# Altium PCB Module Board.PcbDoc (part 3 of 6)
Units mm, origin at the board's own origin, x right, y up, seen from the top; angles counter-clockwise.
Board outline 300 x 80 mm, 4 copper layers (Top Layer, GND1-Layer, GND2-Layer, Bottom Layer), stack 1.586 mm thick; 425 components, 248 nets, 1063 pads, 936 vias.
Unrouted connection lines stored in the file: 3.
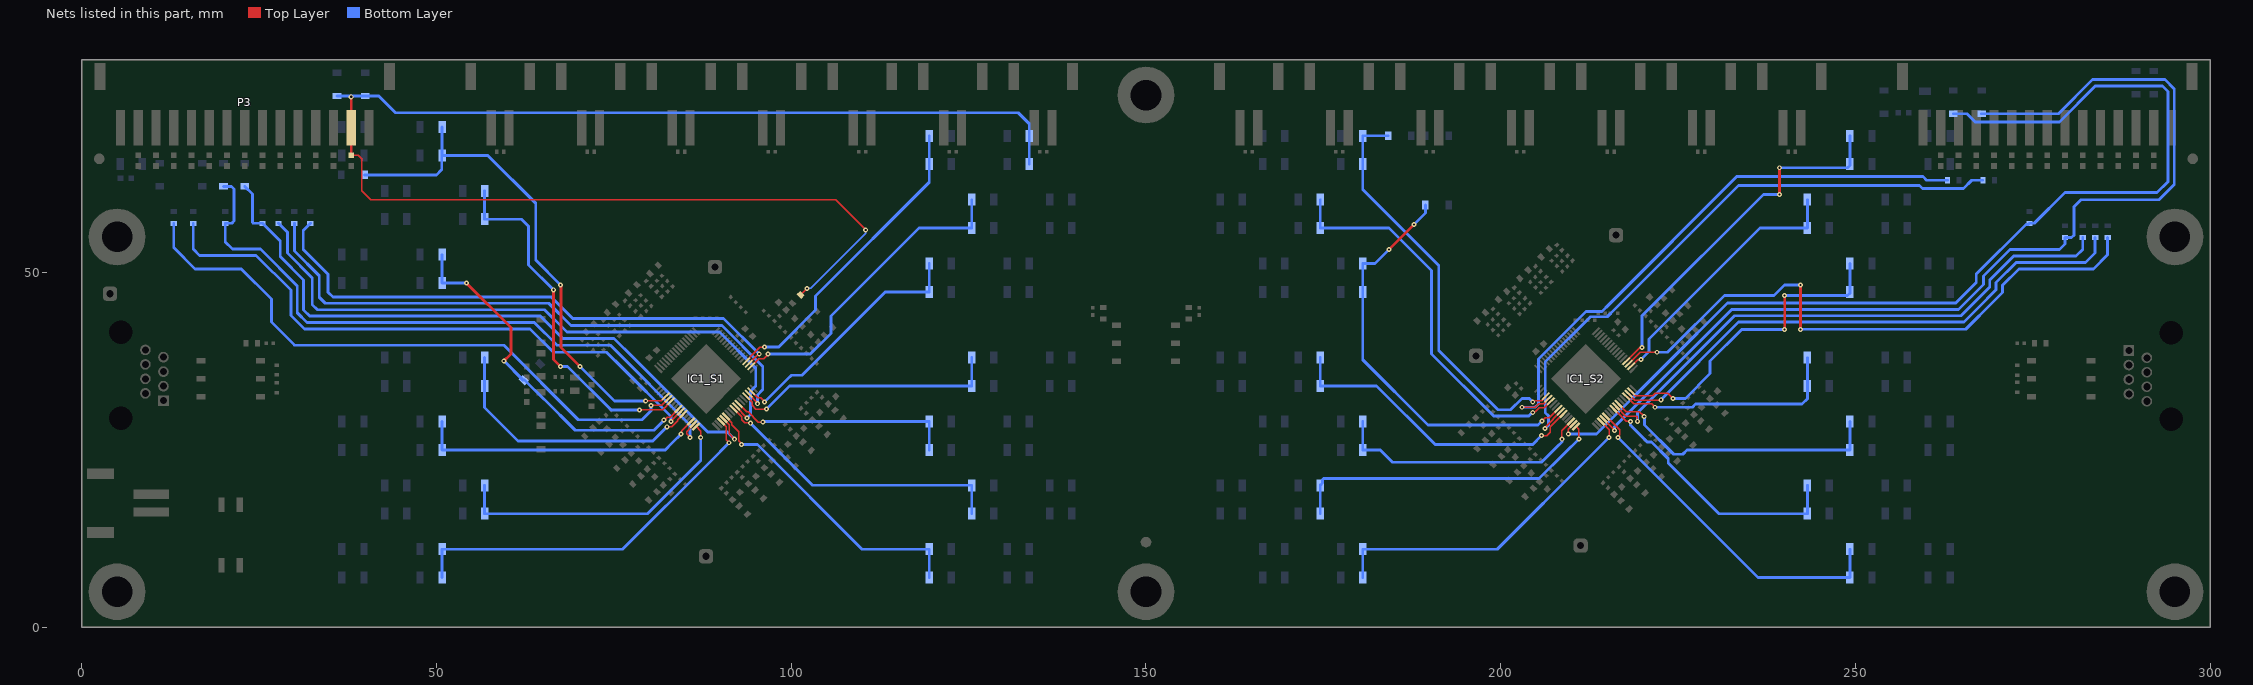
[diagram p5: the nets of this part, all layers, seen from the top]

## Components (designator, comment, footprint, x,y, rotation, side; value= is the part's Value field where it differs from the comment) (continued)
R40_S2 "RES 0603 2R 1%" RES_SM0603_YAGEORC_N 283.75,55.75 r90 bottom value=2R (schematic designator R40)
R41_S1 "RES 0603 3kR 1%" RES_SM0603_YAGEORC_N 106.75,30 r315 top value=3kR (schematic designator R41)
R41_S2 "RES 0603 3kR 1%" RES_SM0603_YAGEORC_N 231,30.75 r315 top value=3kR (schematic designator R41)
R42_S1 "RES 0402 2kR 1%" FP0402 104,32.75 r315 top value=2kR (schematic designator R42)
R42_S2 "RES 0402 2kR 1%" FP0402 228.25,33.5 r315 top value=2kR (schematic designator R42)
R43_S1 "RES 0603 3kR 1%" RES_SM0603_YAGEORC_N 105.28,41.72 r45 top value=3kR (schematic designator R43)
R43_S2 "RES 0603 3kR 1%" RES_SM0603_YAGEORC_N 228,42.5 r45 top value=3kR (schematic designator R43)
R44_S1 "RES 0402 2kR 1%" FP0402 102.53,38.97 r45 top value=2kR (schematic designator R44)
R44_S2 "RES 0402 2kR 1%" FP0402 225.25,39.75 r45 top value=2kR (schematic designator R44)
R45_S1 "RES 0603 2R 1%" RES_SM0603_YAGEORC_N 32.25,57.75 r90 bottom value=2R (schematic designator R45)
R45_S2 "RES 0603 2R 1%" RES_SM0603_YAGEORC_N 285.5,55.75 r90 bottom value=2R (schematic designator R45)
R46_S1 "RES 0603 3kR 1%" RES_SM0603_YAGEORC_N 103.03,43.97 r45 top value=3kR (schematic designator R46)
R46_S2 "RES 0603 3kR 1%" RES_SM0603_YAGEORC_N 225.75,44.75 r45 top value=3kR (schematic designator R46)
R47_S1 "RES 0402 2kR 1%" FP0402 100.28,41.22 r45 top value=2kR (schematic designator R47)
R47_S2 "RES 0402 2kR 1%" FP0402 223,42 r45 top value=2kR (schematic designator R47)
R48_S1 "RES 0603 3kR 1%" RES_SM0603_YAGEORC_N 100.75,46.25 r45 top value=3kR (schematic designator R48)
R48_S2 "RES 0603 3kR 1%" RES_SM0603_YAGEORC_N 223.5,47 r45 top value=3kR (schematic designator R48)
R49_S1 "RES 0402 2kR 1%" FP0402 98,43.5 r45 top value=2kR (schematic designator R49)
R49_S2 "RES 0402 2kR 1%" FP0402 220.75,44.25 r45 top value=2kR (schematic designator R49)
R50_S1 "RES 1206 10R 1%" RES_SM1206_YAGEORC_N 7,65.25 r0 bottom value=10R (schematic designator R50)
R50_S2 "RES 1206 10R 1%" RES_SM1206_YAGEORC_N 259.75,74 r90 bottom value=10R (schematic designator R50)
R51 "RES 0402 120R 1%" FP0402 67.25,35.25 r0 top value=120R
R52 "RES 0402 120R 1%" FP0402 67.25,33.25 r0 top value=120R
R53 "RES 0603 150R 1%" RES_SM0603_YAGEORC_N 24,40 r180 top value=150R
R54 "RES 0603 150R 1%" RES_SM0603_YAGEORC_N 144,44.25 r90 top value=150R
R55 "RES 0603 150R 1%" RES_SM0603_YAGEORC_N 156,44.25 r270 top value=150R
R56 "RES 0603 150R 1%" RES_SM0603_YAGEORC_N 276,40 r0 top value=150R
R57_RB_C11 "RES 1206 20R 1%" RES_SM1206_YAGEORC_N 132,69.25 r180 bottom value=20R (schematic designator R57)
R57_RB_C12 "RES 1206 20R 1%" RES_SM1206_YAGEORC_N 261.75,69.25 r180 bottom value=20R (schematic designator R57)
R57_RB_C21 "RES 1206 20R 1%" RES_SM1206_YAGEORC_N 138,60.25 r180 bottom value=20R (schematic designator R57)
R57_RB_C22 "RES 1206 20R 1%" RES_SM1206_YAGEORC_N 255.75,60.25 r180 bottom value=20R (schematic designator R57)
R57_RB_C31 "RES 1206 20R 1%" RES_SM1206_YAGEORC_N 132,51.25 r180 bottom value=20R (schematic designator R57)
R57_RB_C32 "RES 1206 20R 1%" RES_SM1206_YAGEORC_N 261.75,47.25 r180 bottom value=20R (schematic designator R57)
R57_RB_C41 "RES 1206 20R 1%" RES_SM1206_YAGEORC_N 138,34 r180 bottom value=20R (schematic designator R57)
R57_RB_C42 "RES 1206 20R 1%" RES_SM1206_YAGEORC_N 255.75,38 r180 bottom value=20R (schematic designator R57)
R57_RB_C51 "RES 1206 20R 1%" RES_SM1206_YAGEORC_N 132,11 r180 bottom value=20R (schematic designator R57)
R57_RB_C52 "RES 1206 20R 1%" RES_SM1206_YAGEORC_N 261.75,7 r180 bottom value=20R (schematic designator R57)
R57_RB_C61 "RES 1206 20R 1%" RES_SM1206_YAGEORC_N 38.25,7 r0 bottom value=20R (schematic designator R57)
R57_RB_C62 "RES 1206 20R 1%" RES_SM1206_YAGEORC_N 168,11 r0 bottom value=20R (schematic designator R57)
R57_RB_C71 "RES 1206 20R 1%" RES_SM1206_YAGEORC_N 44.25,16 r0 bottom value=20R (schematic designator R57)
R57_RB_C72 "RES 1206 20R 1%" RES_SM1206_YAGEORC_N 162,20 r0 bottom value=20R (schematic designator R57)
R57_RB_C81 "RES 1206 20R 1%" RES_SM1206_YAGEORC_N 38.25,25 r0 bottom value=20R (schematic designator R57)
R57_RB_C82 "RES 1206 20R 1%" RES_SM1206_YAGEORC_N 168,29 r0 bottom value=20R (schematic designator R57)
R57_RB_C91 "RES 1206 20R 1%" RES_SM1206_YAGEORC_N 44.25,34 r0 bottom value=20R (schematic designator R57)
R57_RB_C92 "RES 1206 20R 1%" RES_SM1206_YAGEORC_N 162,38 r0 bottom value=20R (schematic designator R57)
R57_RB_C101 "RES 1206 20R 1%" RES_SM1206_YAGEORC_N 38.25,48.5 r0 bottom value=20R (schematic designator R57)
R57_RB_C102 "RES 1206 20R 1%" RES_SM1206_YAGEORC_N 168,51.25 r0 bottom value=20R (schematic designator R57)
R57_RB_C121 "RES 1206 20R 1%" RES_SM1206_YAGEORC_N 38.25,70.5 r0 bottom value=20R (schematic designator R57)
R57_RB_C122 "RES 1206 20R 1%" RES_SM1206_YAGEORC_N 168,69.25 r0 bottom value=20R (schematic designator R57)
R57_RB_C1111 "RES 1206 20R 1%" RES_SM1206_YAGEORC_N 44.25,61.5 r0 bottom value=20R (schematic designator R57)
R57_RB_C1112 "RES 1206 20R 1%" RES_SM1206_YAGEORC_N 162,56.25 r0 bottom value=20R (schematic designator R57)
R57_RB_NA11 "RES 1206 20R 1%" RES_SM1206_YAGEORC_N 132,29 r180 bottom value=20R (schematic designator R57)
R57_RB_NA12 "RES 1206 20R 1%" RES_SM1206_YAGEORC_N 261.75,29 r180 bottom value=20R (schematic designator R57)
R57_RB_NA21 "RES 1206 20R 1%" RES_SM1206_YAGEORC_N 138,16 r180 bottom value=20R (schematic designator R57)
R57_RB_NA22 "RES 1206 20R 1%" RES_SM1206_YAGEORC_N 255.75,16 r180 bottom value=20R (schematic designator R57)
R58_RB_C11 "RES 1206 20R 1%" RES_SM1206_YAGEORC_N 121,69.25 r180 bottom value=20R (schematic designator R58)
R58_RB_C12 "RES 1206 20R 1%" RES_SM1206_YAGEORC_N 250.75,69.25 r180 bottom value=20R (schematic designator R58)
R58_RB_C21 "RES 1206 20R 1%" RES_SM1206_YAGEORC_N 127,60.25 r180 bottom value=20R (schematic designator R58)
R58_RB_C22 "RES 1206 20R 1%" RES_SM1206_YAGEORC_N 244.75,60.25 r180 bottom value=20R (schematic designator R58)
R58_RB_C31 "RES 1206 20R 1%" RES_SM1206_YAGEORC_N 121,51.25 r180 bottom value=20R (schematic designator R58)
R58_RB_C32 "RES 1206 20R 1%" RES_SM1206_YAGEORC_N 250.75,47.25 r180 bottom value=20R (schematic designator R58)
R58_RB_C41 "RES 1206 20R 1%" RES_SM1206_YAGEORC_N 127,34 r180 bottom value=20R (schematic designator R58)
R58_RB_C42 "RES 1206 20R 1%" RES_SM1206_YAGEORC_N 244.75,38 r180 bottom value=20R (schematic designator R58)
R58_RB_C51 "RES 1206 20R 1%" RES_SM1206_YAGEORC_N 121,11 r180 bottom value=20R (schematic designator R58)
R58_RB_C52 "RES 1206 20R 1%" RES_SM1206_YAGEORC_N 250.75,7 r180 bottom value=20R (schematic designator R58)
R58_RB_C61 "RES 1206 20R 1%" RES_SM1206_YAGEORC_N 49.25,7 r0 bottom value=20R (schematic designator R58)
R58_RB_C62 "RES 1206 20R 1%" RES_SM1206_YAGEORC_N 179,11 r0 bottom value=20R (schematic designator R58)
R58_RB_C71 "RES 1206 20R 1%" RES_SM1206_YAGEORC_N 55.25,16 r0 bottom value=20R (schematic designator R58)
R58_RB_C72 "RES 1206 20R 1%" RES_SM1206_YAGEORC_N 173,20 r0 bottom value=20R (schematic designator R58)
R58_RB_C81 "RES 1206 20R 1%" RES_SM1206_YAGEORC_N 49.25,25 r0 bottom value=20R (schematic designator R58)
R58_RB_C82 "RES 1206 20R 1%" RES_SM1206_YAGEORC_N 179,29 r0 bottom value=20R (schematic designator R58)
R58_RB_C91 "RES 1206 20R 1%" RES_SM1206_YAGEORC_N 55.25,34 r0 bottom value=20R (schematic designator R58)
R58_RB_C92 "RES 1206 20R 1%" RES_SM1206_YAGEORC_N 173,38 r0 bottom value=20R (schematic designator R58)
R58_RB_C101 "RES 1206 20R 1%" RES_SM1206_YAGEORC_N 49.25,48.5 r0 bottom value=20R (schematic designator R58)
R58_RB_C102 "RES 1206 20R 1%" RES_SM1206_YAGEORC_N 179,51.25 r0 bottom value=20R (schematic designator R58)
R58_RB_C121 "RES 1206 20R 1%" RES_SM1206_YAGEORC_N 49.25,70.5 r0 bottom value=20R (schematic designator R58)
R58_RB_C122 "RES 1206 20R 1%" RES_SM1206_YAGEORC_N 179,69.25 r0 bottom value=20R (schematic designator R58)
R58_RB_C1111 "RES 1206 20R 1%" RES_SM1206_YAGEORC_N 55.25,61.5 r0 bottom value=20R (schematic designator R58)
R58_RB_C1112 "RES 1206 20R 1%" RES_SM1206_YAGEORC_N 173,56.25 r0 bottom value=20R (schematic designator R58)
R58_RB_NA11 "RES 1206 20R 1%" RES_SM1206_YAGEORC_N 121,29 r180 bottom value=20R (schematic designator R58)
R58_RB_NA12 "RES 1206 20R 1%" RES_SM1206_YAGEORC_N 250.75,29 r180 bottom value=20R (schematic designator R58)
R58_RB_NA21 "RES 1206 20R 1%" RES_SM1206_YAGEORC_N 127,16 r180 bottom value=20R (schematic designator R58)
R58_RB_NA22 "RES 1206 20R 1%" RES_SM1206_YAGEORC_N 244.75,16 r180 bottom value=20R (schematic designator R58)
R59_RB_C11 "RES 1206 20R 1%" RES_SM1206_YAGEORC_N 132,65.25 r180 bottom value=20R (schematic designator R59)
R59_RB_C12 "RES 1206 20R 1%" RES_SM1206_YAGEORC_N 261.75,65.25 r180 bottom value=20R (schematic designator R59)
R59_RB_C21 "RES 1206 20R 1%" RES_SM1206_YAGEORC_N 138,56.25 r180 bottom value=20R (schematic designator R59)
R59_RB_C22 "RES 1206 20R 1%" RES_SM1206_YAGEORC_N 255.75,56.25 r180 bottom value=20R (schematic designator R59)
R59_RB_C31 "RES 1206 20R 1%" RES_SM1206_YAGEORC_N 132,47.25 r180 bottom value=20R (schematic designator R59)
R59_RB_C32 "RES 1206 20R 1%" RES_SM1206_YAGEORC_N 261.75,51.25 r180 bottom value=20R (schematic designator R59)
R59_RB_C41 "RES 1206 20R 1%" RES_SM1206_YAGEORC_N 138,38 r180 bottom value=20R (schematic designator R59)
R59_RB_C42 "RES 1206 20R 1%" RES_SM1206_YAGEORC_N 255.75,34 r180 bottom value=20R (schematic designator R59)
R59_RB_C51 "RES 1206 20R 1%" RES_SM1206_YAGEORC_N 132,7 r180 bottom value=20R (schematic designator R59)
R59_RB_C52 "RES 1206 20R 1%" RES_SM1206_YAGEORC_N 261.75,11 r180 bottom value=20R (schematic designator R59)
R59_RB_C61 "RES 1206 20R 1%" RES_SM1206_YAGEORC_N 38.25,11 r0 bottom value=20R (schematic designator R59)
R59_RB_C62 "RES 1206 20R 1%" RES_SM1206_YAGEORC_N 168,7 r0 bottom value=20R (schematic designator R59)
R59_RB_C71 "RES 1206 20R 1%" RES_SM1206_YAGEORC_N 44.25,20 r0 bottom value=20R (schematic designator R59)
R59_RB_C72 "RES 1206 20R 1%" RES_SM1206_YAGEORC_N 162,16 r0 bottom value=20R (schematic designator R59)
R59_RB_C81 "RES 1206 20R 1%" RES_SM1206_YAGEORC_N 38.25,29 r0 bottom value=20R (schematic designator R59)
R59_RB_C82 "RES 1206 20R 1%" RES_SM1206_YAGEORC_N 168,25 r0 bottom value=20R (schematic designator R59)
R59_RB_C91 "RES 1206 20R 1%" RES_SM1206_YAGEORC_N 44.25,38 r0 bottom value=20R (schematic designator R59)
R59_RB_C92 "RES 1206 20R 1%" RES_SM1206_YAGEORC_N 162,34 r0 bottom value=20R (schematic designator R59)
R59_RB_C101 "RES 1206 20R 1%" RES_SM1206_YAGEORC_N 38.25,52.5 r0 bottom value=20R (schematic designator R59)
R59_RB_C102 "RES 1206 20R 1%" RES_SM1206_YAGEORC_N 168,47.25 r0 bottom value=20R (schematic designator R59)
R59_RB_C121 "RES 1206 20R 1%" RES_SM1206_YAGEORC_N 38.25,66.5 r0 bottom value=20R (schematic designator R59)
R59_RB_C122 "RES 1206 20R 1%" RES_SM1206_YAGEORC_N 168,65.25 r0 bottom value=20R (schematic designator R59)
R59_RB_C1111 "RES 1206 20R 1%" RES_SM1206_YAGEORC_N 44.25,57.5 r0 bottom value=20R (schematic designator R59)
R59_RB_C1112 "RES 1206 20R 1%" RES_SM1206_YAGEORC_N 162,60.25 r0 bottom value=20R (schematic designator R59)
R59_RB_NA11 "RES 1206 20R 1%" RES_SM1206_YAGEORC_N 132,25 r180 bottom value=20R (schematic designator R59)
R59_RB_NA12 "RES 1206 20R 1%" RES_SM1206_YAGEORC_N 261.75,25 r180 bottom value=20R (schematic designator R59)
R59_RB_NA21 "RES 1206 20R 1%" RES_SM1206_YAGEORC_N 138,20 r180 bottom value=20R (schematic designator R59)
R59_RB_NA22 "RES 1206 20R 1%" RES_SM1206_YAGEORC_N 255.75,20 r180 bottom value=20R (schematic designator R59)
R60_RB_C11 "RES 1206 20R 1%" RES_SM1206_YAGEORC_N 121,65.25 r180 bottom value=20R (schematic designator R60)
R60_RB_C12 "RES 1206 20R 1%" RES_SM1206_YAGEORC_N 250.75,65.25 r180 bottom value=20R (schematic designator R60)
R60_RB_C21 "RES 1206 20R 1%" RES_SM1206_YAGEORC_N 127,56.25 r180 bottom value=20R (schematic designator R60)
R60_RB_C22 "RES 1206 20R 1%" RES_SM1206_YAGEORC_N 244.75,56.25 r180 bottom value=20R (schematic designator R60)
R60_RB_C31 "RES 1206 20R 1%" RES_SM1206_YAGEORC_N 121,47.25 r180 bottom value=20R (schematic designator R60)
R60_RB_C32 "RES 1206 20R 1%" RES_SM1206_YAGEORC_N 250.75,51.25 r180 bottom value=20R (schematic designator R60)
R60_RB_C41 "RES 1206 20R 1%" RES_SM1206_YAGEORC_N 127,38 r180 bottom value=20R (schematic designator R60)
R60_RB_C42 "RES 1206 20R 1%" RES_SM1206_YAGEORC_N 244.75,34 r180 bottom value=20R (schematic designator R60)
R60_RB_C51 "RES 1206 20R 1%" RES_SM1206_YAGEORC_N 121,7 r180 bottom value=20R (schematic designator R60)
R60_RB_C52 "RES 1206 20R 1%" RES_SM1206_YAGEORC_N 250.75,11 r180 bottom value=20R (schematic designator R60)
R60_RB_C61 "RES 1206 20R 1%" RES_SM1206_YAGEORC_N 49.25,11 r0 bottom value=20R (schematic designator R60)
R60_RB_C62 "RES 1206 20R 1%" RES_SM1206_YAGEORC_N 179,7 r0 bottom value=20R (schematic designator R60)
R60_RB_C71 "RES 1206 20R 1%" RES_SM1206_YAGEORC_N 55.25,20 r0 bottom value=20R (schematic designator R60)
R60_RB_C72 "RES 1206 20R 1%" RES_SM1206_YAGEORC_N 173,16 r0 bottom value=20R (schematic designator R60)
R60_RB_C81 "RES 1206 20R 1%" RES_SM1206_YAGEORC_N 49.25,29 r0 bottom value=20R (schematic designator R60)
R60_RB_C82 "RES 1206 20R 1%" RES_SM1206_YAGEORC_N 179,25 r0 bottom value=20R (schematic designator R60)
R60_RB_C91 "RES 1206 20R 1%" RES_SM1206_YAGEORC_N 55.25,38 r0 bottom value=20R (schematic designator R60)
R60_RB_C92 "RES 1206 20R 1%" RES_SM1206_YAGEORC_N 173,34 r0 bottom value=20R (schematic designator R60)
R60_RB_C101 "RES 1206 20R 1%" RES_SM1206_YAGEORC_N 49.25,52.5 r0 bottom value=20R (schematic designator R60)
R60_RB_C102 "RES 1206 20R 1%" RES_SM1206_YAGEORC_N 179,47.25 r0 bottom value=20R (schematic designator R60)
R60_RB_C121 "RES 1206 20R 1%" RES_SM1206_YAGEORC_N 49.25,66.5 r0 bottom value=20R (schematic designator R60)
R60_RB_C122 "RES 1206 20R 1%" RES_SM1206_YAGEORC_N 179,65.25 r0 bottom value=20R (schematic designator R60)
R60_RB_C1111 "RES 1206 20R 1%" RES_SM1206_YAGEORC_N 55.25,57.5 r0 bottom value=20R (schematic designator R60)
R60_RB_C1112 "RES 1206 20R 1%" RES_SM1206_YAGEORC_N 173,60.25 r0 bottom value=20R (schematic designator R60)
R60_RB_NA11 "RES 1206 20R 1%" RES_SM1206_YAGEORC_N 121,25 r180 bottom value=20R (schematic designator R60)
R60_RB_NA12 "RES 1206 20R 1%" RES_SM1206_YAGEORC_N 250.75,25 r180 bottom value=20R (schematic designator R60)
R60_RB_NA21 "RES 1206 20R 1%" RES_SM1206_YAGEORC_N 127,20 r180 bottom value=20R (schematic designator R60)
R60_RB_NA22 "RES 1206 20R 1%" RES_SM1206_YAGEORC_N 244.75,20 r180 bottom value=20R (schematic designator R60)
R61_S1 "RES 0402 100kR 1%" FP0402 84.5,67 r180 top value=100kR (schematic designator R61)
R61_S2 "RES 0402 100kR 1%" FP0402 215.5,67 r180 top value=100kR (schematic designator R61)
R62_S1 "RES 0402 100kR 1%" FP0402 71.75,67 r180 top value=100kR (schematic designator R62)
R62_S2 "RES 0402 100kR 1%" FP0402 228.25,67 r180 top value=100kR (schematic designator R62)
R63_S1 "RES 0402 100kR 1%" FP0402 59,67 r180 top value=100kR (schematic designator R63)
R63_S2 "RES 0402 100kR 1%" FP0402 241,67 r180 top value=100kR (schematic designator R63)
S1 "DSIC02LSGET" SOP254P930X445-4N 21,13 r90 top
T1 "HM2103NL" FP-HM2103NL-MFG 21,35 r270 top
T2 "HM2103NL" FP-HM2103NL-MFG 150,40 r270 top locked
T3 "HM2103NL" FP-HM2103NL-MFG 279,35 r90 top
TP1_S1 "GTT_ProbeerPunt" GTT_ProbeerPuntFP 88,10 r90 top (schematic designator TP1)
TP1_S2 "GTT_ProbeerPunt" GTT_ProbeerPuntFP 211.25,11.5 r90 top (schematic designator TP1)
TP2_S1 "GTT_ProbeerPunt" GTT_ProbeerPuntFP 4,47 r90 top (schematic designator TP2)
TP2_S2 "GTT_ProbeerPunt" GTT_ProbeerPuntFP 196.5,38.25 r90 top (schematic designator TP2)
TP3_S1 "GTT_ProbeerPunt" GTT_ProbeerPuntFP 89.25,50.75 r90 top (schematic designator TP3)
TP3_S2 "GTT_ProbeerPunt" GTT_ProbeerPuntFP 216.25,55.25 r90 top (schematic designator TP3)

## Footprints (in the part's own frame and the unit in brackets; to place one, negate y for a bottom-side part, rotate by r counter-clockwise, add the part's x,y. Pads: shape width x height; smd on the part's side, far side on the other; paste and mask are expansions set on the pad)
"Fiducial 1.5mm" [mm]
  round 1.5 smd mask+0.75: ""(0,0)
  Top Layer keep-out circle w0.2: c0,0 r1.4
FP0402 [mm]
  rect 0.5x0.6 smd: 1(-0.5,0) 2(0.5,0)
  body extent -0.85,-0.4 0.85,0.4, height 0.25
FP-HM2103NL-MFG [mm]
  rect 0.76x1.27 smd paste+0 mask+0: 1(-2.54,-4.19) 2(0,-4.19) 3(2.54,-4.19) 4(2.54,4.19) 5(0,4.19) 6(-2.54,4.19)
  silkscreen extent -4.07,-4.58 4.07,3.62, body extent -4.17,-4.92 4.17,4.92, height 0.25
GTT_ProbeerPuntFP [mm]
  rrect50% 2x2 hole 1: 1(0,0)
ONSC-SOD-123-2-425-04_V [mm] "SOD, 2-Leads, Body 2.69x1.6mm"
  rect 0.91x1.22 smd: 1(-1.635,0) 2(1.635,0)
  silkscreen extent -1.76,-0.8 0.78,1.28, body extent -1.35,-0.8 1.35,0.8, height 1.35
PESD5V0V1BB115 [mm]
  rect 0.5x0.6 smd: 1(-0.7,0) 2(0.7,0)
  silkscreen extent -1.5,-0.05 -1.4,0.05, body extent -0.8,-0.42 0.8,0.41, height 0.61
QFP50P1200X1200X160-65N [mm]
  rect 1.475x0.3 smd: 1(-5.738,3.75) 2(-5.738,3.25) 3(-5.738,2.75) 4(-5.738,2.25) 5(-5.738,1.75) 6(-5.738,1.25) 7(-5.738,0.75) 8(-5.738,0.25) 9(-5.738,-0.25) 10(-5.738,-0.75) 11(-5.738,-1.25) 12(-5.738,-1.75) 13(-5.738,-2.25) 14(-5.738,-2.75) 15(-5.738,-3.25) 16(-5.738,-3.75) 33(5.738,-3.75) 34(5.738,-3.25) 35(5.738,-2.75) 36(5.738,-2.25) 37(5.738,-1.75) 38(5.738,-1.25) 39(5.738,-0.75) 40(5.738,-0.25) 41(5.738,0.25) 42(5.738,0.75) 43(5.738,1.25) 44(5.738,1.75) 45(5.738,2.25) 46(5.738,2.75) 47(5.738,3.25) 48(5.738,3.75)
  rect 0.3x1.475 smd: 17(-3.75,-5.738) 18(-3.25,-5.738) 19(-2.75,-5.738) 20(-2.25,-5.738) 21(-1.75,-5.738) 22(-1.25,-5.738) 23(-0.75,-5.738) 24(-0.25,-5.738) 25(0.25,-5.738) 26(0.75,-5.738) 27(1.25,-5.738) 28(1.75,-5.738) 29(2.25,-5.738) 30(2.75,-5.738) 31(3.25,-5.738) 32(3.75,-5.738) 49(3.75,5.738) 50(3.25,5.738) 51(2.75,5.738) 52(2.25,5.738) 53(1.75,5.738) 54(1.25,5.738) 55(0.75,5.738) 56(0.25,5.738) 57(-0.25,5.738) 58(-0.75,5.738) 59(-1.25,5.738) 60(-1.75,5.738) 61(-2.25,5.738) 62(-2.75,5.738) 63(-3.25,5.738) 64(-3.75,5.738)
  rect 7x7 smd: 65(0,0)
  silkscreen extent -6.35,4.38 -6.1,4.62, body extent -6,-6 6,6, height 1.6
RES_SM0603_YAGEORC_N [mm] "Resistor, Yageo RC_L, SM0603, IPC Medium Density"
  rect 0.7x0.9 smd: 1(-0.827,0) 2(0.827,0)
  body extent -0.85,-0.45 0.85,0.45, height 0.55
RES_SM1206_YAGEORC_N [mm] "Resistor, Yageo RC_L, SM1206, IPC Medium Density"
  rect 1.05x1.7 smd: 1(-1.552,0) 2(1.552,0)
  body extent -1.6,-0.85 1.6,0.85, height 0.65
RJ80416 [mm]
  rect 1.5x1.5 hole 1: 1(0,0)
  round 1.5 hole 1: 2(-1.02,-2.54) 3(-2.04,0) 4(-3.06,-2.54) 5(-4.08,0) 6(-5.1,-2.54) 7(-6.12,0) 8(-7.14,-2.54)
  round 1.65 hole 3.3 unplated: 9(-9.65,-6) 10(2.51,-6)
  silkscreen extent -11.17,-10.54 4.03,1.3, body extent -11.2,-11.3 4.06,0.7, height 11.8
SOP254P930X445-4N [mm]
  rect 2x0.9 smd: 1(-4.25,1.27) 2(-4.25,-1.27) 3(4.25,-1.27) 4(4.25,1.27)
  silkscreen extent -5.25,-2.54 2.9,2.54, body extent -4.65,-2.54 4.65,2.54, height 4.45
WCAP-CSGP_0402_L1W0.5H0.5 [mm] "Ceramic Capacitors, body 1x0.5mm"
  rect 0.5x0.5 smd: 1(-0.5,0) 2(0.5,0)
  body extent -0.5,-0.25 0.5,0.25, height 0.5
WCAP-CSGP_0603_L1.6W0.8H0.8_Reflow [mm] "Ceramic Capacitors, body 1.6x0.8mm"
  rect 0.8x0.8 smd: 1(-0.75,0) 2(0.75,0)
  body extent -0.8,-0.4 0.8,0.4, height 0.8
WCAP-CSGP_0805_L2W1.25H0.6_Reflow [mm] "Ceramic Capacitors, body 2x1.25mm"
  rect 0.9x1.3 smd: 1(-0.95,0) 2(0.95,0)
  body extent -1,-0.63 1,0.63, height 0.6
WF-1F254B2P [mm]
  rect 1.3x5 smd: 1(-1.25,3.6) 2(1.25,3.6)
  rect 1.5x3.8 smd: 3(4.15,-3.6) 4(-4.15,-3.6)
  silkscreen extent -4.9,-5.6 5.1,2.3, body extent -4.96,-5.55 5.05,2.3, height 6.05
WF-1F254B15P [mm]
  rect 1.3x5 smd: 1(-17.5,3.6) 2(-15,3.6) 3(-12.5,3.6) 4(-10,3.6) 5(-7.5,3.6) 6(-5,3.6) 7(-2.5,3.6) 8(0,3.6) 9(2.5,3.6) 10(5,3.6) 11(7.5,3.6) 12(10,3.6) 13(12.5,3.6) 14(15,3.6) 15(17.5,3.6)
  rect 1.5x3.8 smd: 16(20.4,-3.6) 17(-20.4,-3.6)
  silkscreen extent -21.15,-5.6 21.35,2.3, body extent -21.21,-5.55 21.25,2.3, height 6.05

## Part data
*1 *3 *5: library part CMP-00028-00005-4, "Fiducial 1.5", Pins=0
C1_S1 C1_S2 C5_S1 C5_S2 C13_S1 C13_S2 C19_S1 C19_S2 C21_S1 C21_S2 C26_S1 C26_S2 C30_S1 C30_S2 C36_S1 C36_S2 C39_S1 C39_S2 C48_S1 C48_S2 C51_S1 C51_S2 C54_S1 C54_S2 C57_S1 C57_S2 C60_S1 C60_S2 C62_S1 C62_S2 C64 C65 C67 C68: library part CMP-001-01309-1, "GTT Standard 0603 non-polarized capacitor", Case/Package=0603, JLCPCB Part #=C1622, Tolerance=5%, Voltage Rating=100V, Category="Multilayer Ceramic Chip Capacitors", Ceramic Type=X7R, Pins=2
C2_S1 C2_S2 C6_S1 C6_S2 C14_S1 C14_S2 C20_S1 C20_S2 C27_S1 C27_S2 C31_S1 C31_S2 C37_S1 C37_S2 C40_S1 C40_S2 C43_S1 C43_S2 C47_S1 C47_S2 C49_S1 C49_S2 C52_S1 C52_S2 C55_S1 C55_S2 C58_S1 C58_S2 C63_S1 C63_S2: library part CMP-001-01309-1, "GTT Standard 0603 non-polarized capacitor", Case/Package=0603, JLCPCB Part #=C14663, Tolerance=5%, Voltage Rating=100V, Category="Multilayer Ceramic Chip Capacitors", Ceramic Type=X7R, Pins=2
C3_S1 C3_S2 C7_S1 C7_S2 C8_S1 C8_S2 C9_S1 C9_S2 C12_S1 C12_S2 C18_S1 C18_S2 C23_S1 C23_S2 C24_S1 C24_S2 C25_S1 C25_S2 C29_S1 C29_S2 C33_S1 C33_S2 C34_S1 C34_S2 C35_S1 C35_S2 C41_S1 C41_S2 C44_S1 C44_S2 C45_S1 C45_S2 C46_S1 C46_S2: library part CMP-001-01308-5, "GTT Standard 0402 non-polarized capacitor", Case/Package=0402, JLCPCB Part #=C1523, Category="Multilayer Ceramic Chip Capacitors", Ceramic Type=X7R, Pins=2
C4_S1 C4_S2 C10_S1 C10_S2 C15_S1 C15_S2 C22_S1 C22_S2 C28_S1 C28_S2 C32_S1 C32_S2 C38_S1 C38_S2 C42_S1 C42_S2 C50_S1 C50_S2 C53_S1 C53_S2 C56_S1 C56_S2 C59_S1 C59_S2 C61_S1 C61_S2 C71 C72 C77 C80: library part CMP-001-01308-5, "GTT Standard 0402 non-polarized capacitor", Case/Package=0402, JLCPCB Part #=C15195, Category="Multilayer Ceramic Chip Capacitors", Ceramic Type=X7R, Pins=2
C11_S1 C11_S2: library part CMP-001-01309-1, "GTT Standard 0603 non-polarized capacitor", Case/Package=0603, JLCPCB Part #=C21120, Tolerance=5%, Voltage Rating=100V, Category="Multilayer Ceramic Chip Capacitors", Ceramic Type=X7R, Pins=2
C16_S1 C16_S2 C69 C70 C73 C74 C75 C76 C78 C79: library part CMP-001-01308-5, "GTT Standard 0402 non-polarized capacitor", Case/Package=0402, JLCPCB Part #=C1530, Category="Multilayer Ceramic Chip Capacitors", Ceramic Type=X7R, Pins=2
C17_S1 C17_S2: library part CMP-001-01309-1, "GTT Standard 0603 non-polarized capacitor", Case/Package=0603, JLCPCB Part #=C23630, Tolerance=5%, Voltage Rating=100V, Category="Multilayer Ceramic Chip Capacitors", Ceramic Type=X7R, Pins=2
C66: library part CMP-001-01310-1, "GTT Standard 0805 non-polarized capacitor", Case/Package=0805, JLCPCB Part #=C440198, Category="Multilayer Ceramic Chip Capacitors", Ceramic Type=X7R, Pins=2
D1_S1 D1_S2: library part CMP-1060-00447-1, "Zener Voltage Regulator, 500 mW, 2-Pin SOD-123, Pb-Free, Tape and Reel", Manufacturer="On Semiconductor", ComponentLink1Description="Manufacturer URL", ComponentLink1URL=http://www.onsemi.com/, ComponentLink2Description=Datasheet, ComponentLink2URL=http://www.onsemi.com/pub_link/Collateral/MMSZ5221BT1-D.PDF, ComponentLink3Description="Package Specification", ComponentLink3URL=http://www.onsemi.com/pub_link/Collateral/425-04.PDF, DatasheetVersion="Rev. 12", Mounting Technology="Surface Mount", P Max (W)=0.5, PackageDescription="2-Pin SOD, Body 1.6 x 2.69 mm", PackageReference=SOD-123-2-425-04, PackageVersion="Rev. G, 10/2009", Packing="Tape and Reel", PartNumber=MMSZ5260BT1G, RoHS=Pb-Free, VZ Typ (V)=43
D2_S1 D2_S2 D8_S1 D8_S2: library part CMP-1060-00553-1, "Zener Voltage Regulator, 500 mW, 2-Pin SOD-123, Pb-Free, Tape and Reel", Manufacturer="On Semiconductor", ComponentLink1Description="Manufacturer URL", ComponentLink1URL=http://www.onsemi.com/, ComponentLink2Description=Datasheet, ComponentLink2URL=http://www.onsemi.com/pub_link/Collateral/MMSZ5221BT1-D.PDF, ComponentLink3Description="Package Specification", ComponentLink3URL=http://www.onsemi.com/pub_link/Collateral/425-04.PDF, DatasheetVersion="Rev. 12", Mounting Technology="Surface Mount", P Max (W)=0.5, PackageDescription="2-Pin SOD, Body 1.6 x 2.69 mm", PackageReference=SOD-123-2-425-04, PackageVersion="Rev. G, 10/2009", Packing="Tape and Reel", PartNumber=MMSZ5237BT1G, RoHS=Pb-Free, VZ Typ (V)=8.2
D3_S1 D3_S2: library part CMP-1060-00445-1, "Zener Voltage Regulator, 500 mW, 2-Pin SOD-123, Pb-Free, Tape and Reel", JLCPCB Part #=C94386, Manufacturer="On Semiconductor", ComponentLink1Description="Manufacturer URL", ComponentLink1URL=http://www.onsemi.com/, ComponentLink2Description=Datasheet, ComponentLink2URL=http://www.onsemi.com/pub_link/Collateral/MMSZ5221BT1-D.PDF, ComponentLink3Description="Package Specification", ComponentLink3URL=http://www.onsemi.com/pub_link/Collateral/425-04.PDF, DatasheetVersion="Rev. 12", Mounting Technology="Surface Mount", P Max (W)=0.5, PackageDescription="2-Pin SOD, Body 1.6 x 2.69 mm", PackageReference=SOD-123-2-425-04, PackageVersion="Rev. G, 10/2009", Packing="Tape and Reel", PartNumber=MMSZ5250BT1G, RoHS=Pb-Free, VZ Typ (V)=20
D4_S1 D4_S2: library part CMP-1060-00361-1, "Zener Voltage Regulator, 500 mW, 2-Pin SOD-123, Pb-Free, Tape and Reel", JLCPCB Part #=C80160, Manufacturer="On Semiconductor", ComponentLink1Description="Manufacturer URL", ComponentLink1URL=http://www.onsemi.com/, ComponentLink2Description=Datasheet, ComponentLink2URL=http://www.onsemi.com/pub_link/Collateral/MMSZ5221BT1-D.PDF, ComponentLink3Description="Package Specification", ComponentLink3URL=http://www.onsemi.com/pub_link/Collateral/425-04.PDF, DatasheetVersion="Rev. 12", Mounting Technology="Surface Mount", P Max (W)=0.5, PackageDescription="2-Pin SOD, Body 1.6 x 2.69 mm", PackageReference=SOD-123-2-425-04, PackageVersion="Rev. G, 10/2009", Packing="Tape and Reel", PartNumber=MMSZ5267BT1G, RoHS=Pb-Free, VZ Typ (V)=75
D5_S1 D5_S2: library part CMP-1060-00445-1, "MMSZ5255BT1 Series 500 mW 10 mA 28 V SMT Zener Voltage Regulator - SOD-123", Manufacturer="On Semiconductor", PartNumber=MMSZ5250BT1G, ComponentLink1Description="Manufacturer URL", ComponentLink1URL=http://www.onsemi.com/, ComponentLink2Description=Datasheet, ComponentLink2URL=http://www.onsemi.com/pub_link/Collateral/MMSZ5221BT1-D.PDF, ComponentLink3Description="Package Specification", ComponentLink3URL=http://www.onsemi.com/pub_link/Collateral/425-04.PDF, DatasheetVersion="Rev. 12", Mounting Technology="Surface Mount", P Max (W)=0.5, PackageDescription="2-Pin SOD, Body 1.6 x 2.69 mm", PackageReference=SOD-123-2-425-04, PackageVersion="Rev. G, 10/2009", Packing="Tape and Reel", RoHS=Pb-Free, VZ Typ (V)=20
D6_S1 D6_S2 D7_S1 D7_S2: library part CMP-004-00003-1, "Schottky Power Rectifier, 20 V, 5.5 A, -65 to 125 degC, 2-Pin SMD, RoHS, Tape and Reel", Case/Package=SOD, Forward Current=5dA, Forward Voltage=3.85dV, Manufacturer="ON Semiconductor", Max Operating Temperature=125°C, Max Surge Current=5.5A, Min Operating Temperature=-65°C, Package Description="2-Pin Surface Mount Device, Body 2.69 x 1.6 mm", Package Quantity=3000, Package Reference=SOD-123-2-425-04, Peak Reverse Current=250uA, Datasheet URL=http://www.onsemi.cn/pub_link/Collateral/MBR0520LT1-D.PDF, Datasheet Version="Rev. 6, 01/2012", Elements=1, Manufacturer URL=http://www.onsemi.com/, Mounting Technology=SM, Packaging=TapeandReel, Pins=2, RoHS Compliant=True
D9 D10 D11 D12: library part CMP-1060-00509-1, "Zener Voltage Regulator, 500 mW, 2-Pin SOD-123, Pb-Free, Tape and Reel", Manufacturer="On Semiconductor", ComponentLink1Description="Manufacturer URL", ComponentLink1URL=http://www.onsemi.com/, ComponentLink2Description=Datasheet, ComponentLink2URL=http://www.onsemi.com/pub_link/Collateral/MMSZ4678T1-D.PDF, ComponentLink3Description="Package Specification", ComponentLink3URL=http://www.onsemi.com/pub_link/Collateral/425-04.PDF, DatasheetVersion="Rev. 9", Mounting Technology="Surface Mount", P Max (W)=0.5, PackageDescription="2-Pin SOD, Body 1.6 x 2.69 mm", PackageReference=SOD-123-2-425-04, PackageVersion="Rev. G, 10/2009", Packing="Tape and Reel", PartNumber=MMSZ4679T1G, RoHS=Pb-Free, VZ Typ (V)=2
D13 D14 D15 D16: library part CMP-004-00097-1, "PESD5V0V1BB - Very low capacitance bidirectional ESD protection diode", Manufacturer_Name=Nexperia, Mouser Part Number=771-PESD5V0V1BB115, Arrow Part Number=PESD5V0V1BB,115, Arrow Price/Stock=https://www.arrow.com/en/products/pesd5v0v1bb115/nexperia?region=nac, Datasheet Link=https://assets.nexperia.com/documents/data-sheet/PESD5V0V1BB.pdf, Design Item ID=PESD5V0V1BB,115, Height=0.65mm, Manufacturer_Part_Number=PESD5V0V1BB,115, Mouser Price/Stock=https://www.mouser.co.uk/ProductDetail/Nexperia/PESD5V0V1BB115?qs=GcY6OjH1zdkfLKV5vNnV%252BA%3D%3D, Source=TempSchematics.schlib
IC1_S1 IC1_S2: library part CMP-031-00033-2, "Integrated Circuit", Manufacturer_Name=NXP, Mouser Part Number=771-MC33771CTP1AE, Arrow Part Number=MC33771CTP1AE, Arrow Price/Stock=https://www.arrow.com/en/products/mc33771ctp1ae/nxp-semiconductors?region=europe, Datasheet Link=https://eu.mouser.com/datasheet/2/302/PB_MC33771C-1949877.pdf, Design Item ID=MC33771CTP1AE, Height=1.6mm, Manufacturer_Part_Number=MC33771CTP1AE, Mouser Price/Stock=https://www.mouser.co.uk/ProductDetail/NXP-Semiconductors/MC33771CTP1AE?qs=wnTfsH77Xs56aES1BMo%252B4w%3D%3D, Source=TempSchematics.schlib
J1 J2: "Connector", Manufacturer_Name=FG, Datasheet Link=https://www.lcsc.com/datasheet/lcsc_datasheet_2306211558_FG-RJ-804-1-6_C7205183.pdf, Height=11.7mm, Manufacturer_Part_Number=RJ-804-1-6
P1 P2 P4 P5 P6 P7 P9 P10 P11: "2-pins JST XHB connector SMD right-angle"
P3 P8: "15-pins JST XHB connector SMD right-angle", Pin Count=15
P12 P13 P14 P15 P16 P17: library part WF-1F254B2P, "2-pins JST XHB connector SMD right-angle"
R1_S1 R1_S2 R7_S1 R7_S2 R9_S1 R9_S2 R13_S1 R13_S2 R17_S1 R17_S2 R20_S1 R20_S2 R25_S1 R25_S2 R28_S1 R28_S2 R33_S1 R33_S2 R36_S1 R36_S2 R38_S1 R38_S2 R41_S1 R41_S2 R43_S1 R43_S2 R46_S1 R46_S2 R48_S1 R48_S2: library part CMP-009-00206-3, "GTT Standard 0603 Resistor", Case/Package=0603, JLCPCB Part #=C4211, Power=62.5mW, Tolerance=1%, Voltage Rating=50V, Mounting Technology=SMD
R2_S1 R2_S2 R8_S1 R8_S2 R10_S1 R10_S2 R14_S1 R14_S2 R18_S1 R18_S2 R21_S1 R21_S2 R26_S1 R26_S2 R29_S1 R29_S2 R34_S1 R34_S2 R37_S1 R37_S2 R39_S1 R39_S2 R42_S1 R42_S2 R44_S1 R44_S2 R47_S1 R47_S2 R49_S1 R49_S2: library part CMP-009-00204-16, "GTT Standard 0402 Resistor", Case/Package=0402, JLCPCB Part #=C4109, Power=62.5mW, Tolerance=1%, Voltage Rating=50V, Design Item ID="RES 0402", Mounting Technology=SMD, Source=Passives.SchLib
R3_S1 R3_S2 R12_S1 R12_S2 R22_S1 R22_S2 R30_S1 R30_S2: library part CMP-009-00206-3, "GTT Standard 0603 Resistor", Case/Package=0603, JLCPCB Part #=C23212, Power=62.5mW, Tolerance=1%, Voltage Rating=50V, Mounting Technology=SMD
R4_S1 R4_S2 R11_S1 R11_S2 R19_S1 R19_S2 R27_S1 R27_S2 R35_S1 R35_S2 R40_S1 R40_S2 R45_S1 R45_S2: library part CMP-009-00206-3, "GTT Standard 0603 Resistor", Case/Package=0603, JLCPCB Part #=C22977, Power=100mW, Tolerance=1%, Voltage Rating=50V, Mounting Technology=SMD
R5_S1 R5_S2 R6_S1 R6_S2 R15_S1 R15_S2 R16_S1 R16_S2 R23_S1 R23_S2 R24_S1 R24_S2 R31_S1 R31_S2 R32_S1 R32_S2: library part CMP-009-00204-16, "GTT Standard 0402 Resistor", Case/Package=0402, JLCPCB Part #=C25890, Power=62.5mW, Tolerance=1%, Voltage Rating=50V, Design Item ID="RES 0402", Mounting Technology=SMD, Source=Passives.SchLib
R50_S1 R50_S2: library part CMP-009-00208-2, "GTT Standard 1206 Resistor", Case/Package=1206, JLCPCB Part #=C17903, Power=250mW, Tolerance=1%, Voltage Rating=50V, Mounting Technology=SMD
R51 R52: library part CMP-009-00204-16, "GTT Standard 0402 Resistor", Case/Package=0402, JLCPCB Part #=C25079, Power=62.5mW, Tolerance=1%, Voltage Rating=50V, Design Item ID="RES 0402", Mounting Technology=SMD, Source=Passives.SchLib
R53 R54 R55 R56: library part CMP-009-00206-3, "GTT Standard 0603 Resistor", Case/Package=0603, JLCPCB Part #=C22808, Power=62.5mW, Tolerance=1%, Voltage Rating=50V, Mounting Technology=SMD
R57_RB_C11 R57_RB_C12 R57_RB_C21 R57_RB_C22 R57_RB_C31 R57_RB_C32 R57_RB_C41 R57_RB_C42 R57_RB_C51 R57_RB_C52 R57_RB_C61 R57_RB_C62 R57_RB_C71 R57_RB_C72 R57_RB_C81 R57_RB_C82 R57_RB_C91 R57_RB_C92 R57_RB_C101 R57_RB_C102 R57_RB_C121 R57_RB_C122 R57_RB_C1111 R57_RB_C1112 R57_RB_NA11 R57_RB_NA12 R57_RB_NA21 R57_RB_NA22 R58_RB_C11 R58_RB_C12 R58_RB_C21 R58_RB_C22 R58_RB_C31 R58_RB_C32 R58_RB_C41 R58_RB_C42 R58_RB_C51 R58_RB_C52 R58_RB_C61 R58_RB_C62 R58_RB_C71 R58_RB_C72 R58_RB_C81 R58_RB_C82 R58_RB_C91 R58_RB_C92 R58_RB_C101 R58_RB_C102 R58_RB_C121 R58_RB_C122 R58_RB_C1111 R58_RB_C1112 R58_RB_NA11 R58_RB_NA12 R58_RB_NA21 R58_RB_NA22 R59_RB_C11 R59_RB_C12 R59_RB_C21 R59_RB_C22 R59_RB_C31 R59_RB_C32 R59_RB_C41 R59_RB_C42 R59_RB_C51 R59_RB_C52 R59_RB_C61 R59_RB_C62 R59_RB_C71 R59_RB_C72 R59_RB_C81 R59_RB_C82 R59_RB_C91 R59_RB_C92 R59_RB_C101 R59_RB_C102 R59_RB_C121 R59_RB_C122 R59_RB_C1111 R59_RB_C1112 R59_RB_NA11 R59_RB_NA12 R59_RB_NA21 R59_RB_NA22 R60_RB_C11 R60_RB_C12 R60_RB_C21 R60_RB_C22 R60_RB_C31 R60_RB_C32 R60_RB_C41 R60_RB_C42 R60_RB_C51 R60_RB_C52 R60_RB_C61 R60_RB_C62 R60_RB_C71 R60_RB_C72 R60_RB_C81 R60_RB_C82 R60_RB_C91 R60_RB_C92 R60_RB_C101 R60_RB_C102 R60_RB_C121 R60_RB_C122 R60_RB_C1111 R60_RB_C1112 R60_RB_NA11 R60_RB_NA12 R60_RB_NA21 R60_RB_NA22: library part CMP-009-00208-3, "GTT Standard 1206 Resistor", Case/Package=1206, JLCPCB Part #=C17955, Power=250mW, Tolerance=1%, Voltage Rating=50V, Mounting Technology=SMD
R61_S1 R61_S2 R62_S1 R62_S2 R63_S1 R63_S2: library part CMP-009-00204-16, "GTT Standard 0402 Resistor", Case/Package=0402, JLCPCB Part #=C25741, Power=62.5mW, Tolerance=1%, Voltage Rating=50V, Design Item ID="RES 0402", Mounting Technology=SMD, Source=Passives.SchLib
S1: "Switch", Manufacturer_Name="Dongguan Guangzhu Industrial", Datasheet Link=https://datasheet.lcsc.com/szlcsc/Dongguan-Guangzhu-Industrial-DSIC02LSGET_C54949.pdf, Height=4.45mm, Manufacturer_Part_Number=DSIC02LSGET
T1 T2 T3: library part CMP-16309-000039-1, "XFMR CMC MODULE AECQ BATT MNGT", Inductance Primary=150uH, Isolation Voltage=4300VDC, JLCPCB Part #=C962543, Manufacturer=Pulse, Package=0, Temperature="-40°C to +125°C", Temperature Range High=+125°C, Temperature Range Low=-40°C, Automotive=Yes, Automotive Grade="Grade 1", Category=Trans, ComponentLink2Description=Datasheet, ComponentLink2URL=https://productfinder.pulseeng.com/product/HM2103NL, Device Class L1="Passive Components", Device Class L2=Transformers, Device Class L3=unset, Digikey Description="XFMR CMC MODULE AECQ BATT MNGT", Height=5.72mm, Insertion Loss=0.25dB, Lead Free=Yes, Manufacturer Part Number=HM2103NL, Obsolete Part=false, Octopart=https://octopart.com/hm2103nl-pulse-87646222, Return Loss=20dB, RoHS=TRUE, Standoff Height=0.13mm, Turns Ratio=1:1
TP1_S1 TP1_S2 TP2_S1 TP2_S2 TP3_S1 TP3_S2: library part CMP-00030-00001-6, Design Item ID=GTT_ProbeerPunt, Source=GTT_MainComponentLibrary.SchLib

## Free pads (board coordinates)
  round 8 hole 4.3: 1(5,5) 2(5,55) 3(150,5) 4(150,75) 5(295,5) 6(295,55)

## Via types
v1: diameter 0.7, hole 0.3, Top Layer to Bottom Layer, 936 vias

## Nets (pads, with @x,y where several pads share a name; then routed paths per layer and width w, separated by ;. In a path a pad name is that pad's centre, name@x,y a point inside that pad or via, vN(x,y) a via of type N, cw(c..) or ccw(c..) an arc to the next point about the centre after c; other vN are vias at no path point)
CB_1_S1: IC1_S1.36 R58_RB_C11.2 R60_RB_C11.2 | length 44
  Top Layer w0.2: IC1_S1.36@93.648,37.466 94.17,37.988 94.17,38.018 95.6,39.449 96.199,39.449 v1(96.25,39.5)
  Bottom Layer w0.4: v1(96.25,39.5) 98.25,39.5 103.45,44.7 103.45,46.7 119.448,62.698 R60_RB_C11.2@119.448,65.25 R58_RB_C11.2@119.448,69.25
CB_1_S2: IC1_S2.36 R58_RB_C12.2 R60_RB_C12.2 | length 52
  Top Layer w0.2: IC1_S2.36@217.648,37.466 219.586,39.404 v1(219.904,39.404)
  Top Layer w0.4: v1(239.25,61) v1(239.25,64.75)
  Bottom Layer w0.4: v1(219.904,39.404) 219.889,39.42 219.889,40.911 219.889,43.889 237,61 v1(239.25,61) ; v1(239.25,64.75) 248.873,64.75 249.198,65.075 R58_RB_C12.2@249.198,69.25
CB_2:1_C_S1: IC1_S1.35 R45_S1.1 | length 78
  Top Layer w0.2: IC1_S1.35@94.002,37.113 95.389,38.5 v1(95.5,38.5)
  Bottom Layer w0.4: R45_S1.1@32.25,56.923 31.25,55.923 31.25,53.25 34.75,49.75 34.75,47.212 35.412,46.55 66.2,46.55 69.222,43.528 90.472,43.528 v1(95.5,38.5)
CB_2:1_C_S2: IC1_S2.35 R45_S2.1 | length 85.8
  Top Layer w0.2: IC1_S2.35@218.002,37.113 219.639,38.75 v1(222,38.75)
  Top Layer w0.4: v1(242.25,41.95) v1(242.25,48.25)
  Bottom Layer w0.4: v1(222,38.75) 222.05,38.75 223.5,38.75 231.5,46.75 238.477,46.75 239.977,48.25 v1(242.25,48.25) ; v1(242.25,41.95) 242.3,42 265.523,42 269.5,45.977 269.5,45.992 270.7,47.192 270.7,48.185 273.015,50.5 283.5,50.5 285.5,52.5 R45_S2.1@285.5,54.923
CB_2_S1: IC1_S1.34 R58_RB_C21.2 R60_RB_C21.2 | length 44.6
  Top Layer w0.2: IC1_S1.34@94.355,36.759 95.446,37.85 96.1,37.85 v1(96.75,38.5)
  Bottom Layer w0.4: v1(96.75,38.5) 102.697,38.5 105.599,41.401 105.599,43.849 118,56.25 R60_RB_C21.2@125.448,56.25 R58_RB_C21.2@125.448,60.25
CB_2_S2: IC1_S2.34 R58_RB_C22.2 R60_RB_C22.2 | length 37.9
  Top Layer w0.2: IC1_S2.34@218.355,36.759 219.3,37.704 219.704,37.704 v1(219.75,37.75)
  Bottom Layer w0.4: v1(219.75,37.75) 220.865,38.865 220.865,39.935 220.865,40.615 236.5,56.25 R60_RB_C22.2@243.198,56.25 R58_RB_C22.2@243.198,60.25
CB_3_S1: IC1_S1.31 R58_RB_C31.2 R60_RB_C31.2 | length 36.1
  Top Layer w0.2: IC1_S1.31@94.355,33.241 95.278,32.318 95.682,32.318 v1(96.25,31.75)
  Bottom Layer w0.4: v1(96.25,31.75) 99.475,34.975 100,35.5 101.5,35.5 113.25,47.25 R60_RB_C31.2@119.448,47.25 R58_RB_C31.2@119.448,51.25
CB_3_S2: IC1_S2.31 R58_RB_C32.2 R60_RB_C32.2 | length 45.7
  Top Layer w0.2: IC1_S2.31@218.355,33.241 218.948,32.649 221.433,32.649 221.784,33 223.5,33 v1(224.25,32.25)
  Top Layer w0.4: v1(240,41.95) v1(240,46.75)
  Bottom Layer w0.4: v1(224.25,32.25) 226,32.25 229.5,35.75 229.5,37.5 233.95,41.95 v1(240,41.95) ; v1(240,46.75) 248.873,46.75 249.198,47.075 R60_RB_C32.2@249.198,51.25
CB_4:3_C_S1: IC1_S1.30 R40_S1.1 | length 85.9
  Top Layer w0.2: IC1_S1.30@94.002,32.887 95.154,31.735 95.154,31.596 v1(95.25,31.5)
  Bottom Layer w0.4: R40_S1.1@30,56.923 30,53.023 33.5,49.523 33.5,46.5 34.35,45.65 65.827,45.65 68.977,42.5 82.275,42.5 90.25,42.5 96,36.75 96,33.5 95.25,32.75 v1@95.25,31.517
CB_4:3_C_S2: IC1_S2.30 R40_S2.1 | length 77.5
  Top Layer w0.2: IC1_S2.30@218.002,32.887 218.889,32 222.225,32 222.508,32 v1(222.558,32.05)
  Bottom Layer w0.4: v1(222.558,32.05) 222.558,32.058 233.5,43 265.25,43 268.6,46.35 268.6,46.365 269.8,47.565 269.8,48.558 272.642,51.4 282.4,51.4 283.75,52.75 R40_S2.1@283.75,54.923
CB_4_S1: IC1_S1.29 R58_RB_C41.2 R60_RB_C41.2 | length 38.1
  Top Layer w0.2: IC1_S1.29@93.648,32.534 94.5,31.682 94.5,31.25 95,30.75 v1(96.5,30.75)
  Bottom Layer w0.4: v1(96.5,30.75) 99.75,34 R58_RB_C41.2@125.448,34 R60_RB_C41.2@125.448,38
CB_4_S2: IC1_S2.29 R58_RB_C42.2 R60_RB_C42.2 | length 32.5
  Top Layer w0.2: IC1_S2.29@217.648,32.534 217.798,32.384 217.861,32.384 218.745,31.5 221.25,31.5 221.487,31.263 v1(221.75,31)
  Bottom Layer w0.4: v1(221.75,31) 227,31 227.458,31.458 242.458,31.458 243.198,32.198 R60_RB_C42.2@243.198,34 ; R60_RB_C42.2@243.211,33.97 R58_RB_C42.2@243.211,37.97
CB_5_S1: IC1_S1.26 R58_RB_NA11.2 R60_RB_NA11.2 | length 32
  Top Layer w0.2: IC1_S1.26@92.588,31.473 93.711,30.35 93.923,30.35 95.35,28.923 95.977,28.923 v1(96,28.9)
  Bottom Layer w0.4: v1(96,28.9) 96.081,28.9 96.181,29 96.475,29 R58_RB_NA11.2@119.448,29 R60_RB_NA11.2@119.448,25
CB_5_S2: IC1_S2.26 R58_RB_NA12.2 R60_RB_NA12.2 | length 40.5
  Top Layer w0.2: IC1_S2.26@216.588,31.473 217.661,30.4 219.506,30.4 220.066,29.841 v1(220.207,29.699)
  Bottom Layer w0.4: v1(220.207,29.699) 220.237,29.669 220.237,28.513 224.361,24.389 225.639,24.389 226.25,25 R60_RB_NA12.2@249.198,25 R58_RB_NA12.2@249.198,29
CB_6:5_C_S1: IC1_S1.25 R35_S1.1 | length 89.4
  Top Layer w0.2: IC1_S1.25@92.234,31.119 92.234,31.068 93.75,29.552 v1(93.75,29.5)
  Bottom Layer w0.4: R35_S1.1@27.75,56.923 29,55.673 29,52.75 32.5,49.25 32.5,45.5 33.25,44.75 65.25,44.75 68.401,41.599 81.374,41.599 89.901,41.599 95,36.5 95,34 94.25,33.25 94.25,30 v1(93.75,29.5)
CB_6:5_C_S2: IC1_S2.25 R35_S2.1 | length 80
  Top Layer w0.2: IC1_S2.25@216.234,31.119 216.384,30.969 217.604,29.75 219.191,29.75 219.25,29.691 v1(219.25,29.025)
  Bottom Layer w0.4: v1(219.25,29.025) 219.25,30.227 232.923,43.9 264.863,43.9 268.9,47.937 268.9,48.931 272.269,52.3 281.05,52.3 282,53.25 R35_S2.1@282,54.923
CB_6_S1: IC1_S1.24 R58_RB_NA21.2 R60_RB_NA21.2 | length 42.3
  Top Layer w0.2: IC1_S1.24@91.881,30.766 93,29.646 93,29.25 93.444,28.806 94.194,28.806 v1(94.25,28.75)
  Bottom Layer w0.4: v1(94.25,28.75) 103,20 R60_RB_NA21.2@125.448,20 R58_RB_NA21.2@125.448,16
CB_6_S2: IC1_S2.24 R58_RB_NA22.2 R60_RB_NA22.2 | length 38.1
  Top Layer w0.2: IC1_S2.24@215.881,30.766 217.646,29 v1(218.25,29)
  Bottom Layer w0.4: v1(218.25,29) 218.25,28.5 218.488,28.262 220.625,26.125 221.211,26.125 223.585,23.751 223.585,23.165 230.75,16 R58_RB_NA22.2@243.198,16 R60_RB_NA22.2@243.198,20
CB_7_S1: IC1_S1.21 R58_RB_C51.2 R60_RB_C51.2 | length 41.4
  Top Layer w0.2: IC1_S1.21@90.82,29.705 90.82,29.634 91.65,28.804 91.65,28.522 92.6,27.572 92.6,26.269 93,25.869 v1(93,25.75)
  Bottom Layer w0.4: v1(93,25.75) 95.25,25.75 110,11 R58_RB_C51.2@119.448,11 R60_RB_C51.2@119.448,7
CB_7_S2: IC1_S2.21 R58_RB_C52.2 R60_RB_C52.2 | length 48.8
  Top Layer w0.2: IC1_S2.21@214.82,29.705 215.341,29.184 215.415,29.184 216.737,27.861 216.737,27.122 216.5,26.885 v1(216.5,26.75)
  Bottom Layer w0.4: v1(216.5,26.75) 216.737,26.512 236.25,7 R58_RB_C52.2@249.198,7 R60_RB_C52.2@249.198,11
CB_8:7_C_S1: D1_S1.2 IC1_S1.20 R27_S1.1 | length 93.3
  Top Layer w0.2: IC1_S1.20@90.466,29.352 91.25,28.568 91.25,27.25 v1(92,26.5)
  Bottom Layer w0.4: D1_S1.2@23,62.115 24.077,61.038 24.077,57.04 24.194,56.923 R27_S1.1@25.5,56.923 28,54.423 28,52.25 31.3,48.95 31.3,44.7 32.15,43.85 64.65,43.85 67.801,40.699 75.051,40.699 77.762,37.988 88.25,27.5 91,27.5 v1(92,26.5)
CB_8:7_C_S2: D1_S2.2 IC1_S2.20 R27_S2.1 | length 142.5
  Top Layer w0.2: IC1_S2.20@214.466,29.352 216,27.818 v1(216,27.75)
  Bottom Layer w0.4: v1(216,27.75) 216,28.25 232.55,44.8 264.49,44.8 268,48.31 268,49.5 271.75,53.25 278.75,53.25 279.5,54 R27_S2.1@279.5,54.924 280.424,54.924 280.75,55.25 280.75,59.25 281.75,60.25 292.75,60.25 294.9,62.4 294.9,75.873 293.603,77.17 283.397,77.17 278.592,72.365 D1_S2.2@267.75,72.365
CB_8_S1: IC1_S1.19 R58_RB_C61.2 R60_RB_C61.2 | length 54.1
  Top Layer w0.2: IC1_S1.19@90.113,28.998 90.85,28.261 90.85,26.4 v1@91.24,26.01
  Bottom Layer w0.4: R58_RB_C61.2@50.802,7 R60_RB_C61.2@50.802,11 76.25,11 88.625,23.375 v1(91.25,26)
CB_8_S2: IC1_S2.19 R58_RB_C62.2 R60_RB_C62.2 | length 47.9
  Top Layer w0.2: IC1_S2.19@214.113,28.998 215.25,27.861 v1(215.25,26.75)
  Bottom Layer w0.4: R60_RB_C62.2@180.552,7 R58_RB_C62.2@180.552,11 199.5,11 212.625,24.125 v1(215.25,26.75)
CB_9_S1: IC1_S1.16 R58_RB_C71.2 R60_RB_C71.2 | length 42.6
  Top Layer w0.2: IC1_S1.16@86.594,28.291 87.25,27.635 v1(87.25,26.75)
  Bottom Layer w0.4: R60_RB_C71.2@56.802,20 R58_RB_C71.2@56.802,16 79.75,16 87.25,23.5 v1(87.25,26.75)
CB_9_S2: IC1_S2.16 R58_RB_C72.2 R60_RB_C72.2 | length 45.3
  Top Layer w0.2: IC1_S2.16@210.594,28.291 211,27.885 v1(211,26.55)
  Bottom Layer w0.4: R60_RB_C72.2@174.552,16 R58_RB_C72.2@174.552,20 174.877,20.325 174.877,20.777 175.05,20.95 205.4,20.95 208.938,24.487 v1(211,26.55)
CB_10:9_C_S1: D5_S1.2 IC1_S1.15 R19_S1.1 | length 92.8
  Top Layer w0.2: v1(85.75,26.75) 85.25,27.25 85.25,27.583 86.091,28.424 86.091,28.495 IC1_S1.15@86.241,28.645
  Bottom Layer w0.4: D5_S1.2@20,62.115 21.135,62.115 21.5,61.75 21.5,57.25 21.173,56.923 R19_S1.1@20.25,56.923 20.25,54.3 21.25,53.3 25.2,53.3 30.4,48.1 30.4,44.327 31.777,42.95 63.8,42.95 67,39.75 74.5,39.75 85.75,28.5 v1(85.75,26.75)
CB_10:9_C_S2: D5_S2.2 IC1_S2.15 R19_S2.1 | length 147.5
  Top Layer w0.2: v1(209.505,27.25) 209.5,27.255 209.5,27.904 IC1_S2.15@210.241,28.645
  Bottom Layer w0.4: v1(209.505,27.25) 213.5,27.25 223.525,37.275 231.95,45.7 264.117,45.7 267,48.583 267,49.773 274,56.773 274.35,56.773 R19_S2.1@274.5,56.923 275.173,56.923 279.5,61.25 292.477,61.25 294,62.773 294,75.5 293.23,76.27 283.77,76.27 278.71,71.21 266.85,71.21 265.695,72.365 D5_S2.2@263.75,72.365
CB_10_S1: IC1_S1.14 R58_RB_C81.2 R60_RB_C81.2 | length 41
  Top Layer w0.2: v1(84.5,27.25) 84.596,27.346 84.596,27.707 IC1_S1.14@85.887,28.998
  Bottom Layer w0.4: R60_RB_C81.2@50.802,29 R58_RB_C81.2@50.802,25 82.25,25 83.225,25.975 v1(84.5,27.25)
CB_10_S2: IC1_S2.14 R58_RB_C82.2 R60_RB_C82.2 | length 37.4
  Top Layer w0.2: v1(208.6,26.5) 208.6,27.711 209.737,28.848 IC1_S2.14@209.887,28.998
  Bottom Layer w0.4: R58_RB_C82.2@180.552,29 R60_RB_C82.2@180.552,25 183,25 184.75,23.25 205.75,23.25 207.963,25.462 208.6,26.1 v1(208.6,26.5)
CB_11_S1: IC1_S1.11 R58_RB_C91.2 R60_RB_C91.2 | length 38.7
  Top Layer w0.2: v1(82.5,28.25) 83.174,28.25 84.018,29.094 84.018,29.25 IC1_S1.11@84.827,30.059
  Bottom Layer w0.4: R60_RB_C91.2@56.802,38 R58_RB_C91.2@56.802,34 56.802,30.948 61.5,26.25 80.5,26.25 v1(82.5,28.25)
CB_11_S2: IC1_S2.11 R58_RB_C92.2 R60_RB_C92.2 | length 43.9
  Top Layer w0.2: v1(205.75,27) 206.425,27 206.5,27 207,27.5 207,28.232 IC1_S2.11@208.827,30.059
  Bottom Layer w0.4: R58_RB_C92.2@174.552,38 R60_RB_C92.2@174.552,34 182.5,34 190.75,25.75 204.5,25.75 v1(205.75,27)
CB_12:11_C_S1: IC1_S1.10 R11_S1.2 | length 85.5
  Top Layer w0.2: v1(83.056,28.981) 83.056,28.996 IC1_S1.10@84.473,30.412
  Bottom Layer w0.4: R11_S1.2@15.75,56.935 15.75,53.296 16.646,52.4 24.6,52.4 29.5,47.5 29.5,43.954 31.404,42.05 63.2,42.05 66.5,38.75 74,38.75 76.262,36.488 83.056,29.694 v1(83.056,28.981)
CB_12:11_C_S2: IC1_S2.10 R11_S2.2 | length 85.7
  Top Layer w0.2: v1(206.25,28) 206.346,28.096 206.346,28.285 IC1_S2.10@208.473,30.412
  Bottom Layer w0.4: v1(206.25,28) 206.7,28.45 206.7,29.8 206.25,30.25 206.25,37.374 212.626,43.75 215,43.75 216.025,44.775 233.5,62.25 259,62.25 259.4,61.85 265.217,61.85 266.367,63 R11_S2.2@267.923,63
CB_12_S1: D3_S1.2 IC1_S1.9 R58_RB_C101.2 R60_RB_C101.2 | length 51.6
  Top Layer w0.2: v1(82.049,29.201) 82.17,29.201 82.569,29.6 82.954,29.6 IC1_S1.9@84.119,30.766
  Top Layer w0.4: v1@54.194,48.556 60.5,42.25 60.5,38.5 v1(59.5,37.5)
  Bottom Layer w0.4: R60_RB_C101.2@50.802,52.5 R58_RB_C101.2@50.802,48.5 v1(54.25,48.5) ; v1(59.5,37.5) 59.564,37.5 62.25,34.814 D3_S1.2@62.313,34.814 ; D3_S1.2@62.26,34.866 62.416,34.866 65.125,32.156 65.156,32.156 69.562,27.75 80.665,27.75 82.049,29.134 v1(82.049,29.201)
CB_12_S2: D3_S2.2 IC1_S2.9 R58_RB_C102.2 R60_RB_C102.2 | length 58.8
  Top Layer w0.2: v1(205.8,29.05) 206.25,29.5 206.854,29.5 IC1_S2.9@208.119,30.766
  Top Layer w0.4: v1(184.25,53.25) v1(187.75,56.75)
  Bottom Layer w0.4: v1(184.25,53.25) 182.25,51.25 R58_RB_C102.2@180.552,51.25 R60_RB_C102.2@180.552,47.25 180.552,37.698 189.75,28.5 205.25,28.5 v1(205.8,29.05) ; v1(187.75,56.75) 189.365,58.365 D3_S2.2@189.365,59.5
CB_13_S1: IC1_S1.6 R58_RB_C1111.2 R60_RB_C1111.2 | length 50.8
  Top Layer w0.2: v1(78.6,30.6) 78.65,30.65 81.882,30.65 IC1_S1.6@83.059,31.827
  Top Layer w0.4: v1(66.516,47.551) 66.516,37.734 v1(67.5,36.75)
  Bottom Layer w0.4: R58_RB_C1111.2@56.802,61.5 R60_RB_C1111.2@56.802,57.5 62,57.5 63,56.5 63,51.067 v1(66.516,47.551) ; v1(67.5,36.75) 68.5,36.75 74.65,30.6 v1(78.6,30.6)
CB_13_S2: IC1_S2.6 R58_RB_C1112.2 R60_RB_C1112.2 | length 55.2
  Top Layer w0.2: v1(204.5,30.25) 204.596,30.346 204.846,30.346 205.4,30.9 206.132,30.9 IC1_S2.6@207.059,31.827
  Bottom Layer w0.4: R60_RB_C1112.2@174.552,60.25 R58_RB_C1112.2@174.552,56.25 184.25,56.25 190.25,50.25 190.25,38.5 199,29.75 203.675,29.75 203.939,29.75 204.439,30.25 v1(204.5,30.25)
CB_14:13_C_S1: IC1_S1.5 R4_S1.1 | length 86.7
  Top Layer w0.2: v1(80.25,31.25) 81.775,31.25 IC1_S1.5@82.705,32.18
  Bottom Layer w0.4: R4_S1.1@13,56.923 13,53.5 16,50.5 22.5,50.5 26.75,46.25 26.75,43 30,39.75 59.5,39.75 70,29.25 79,29.25 79.475,29.725 80.25,30.5 v1@80.25,31.214
CB_14:13_C_S2: IC1_S2.5 R4_S2.1 | length 81.5
  Top Layer w0.2: v1(203,31) 204.818,31 205.318,31.5 206.025,31.5 IC1_S2.5@206.705,32.18
  Bottom Layer w0.4: v1(203,31) 204.818,31 205.291,31.473 205.291,37.802 211.989,44.5 214.25,44.5 215.275,45.525 233.25,63.5 259.5,63.5 260,63 R4_S2.1@262.923,63
CB_14_S1: D8_S1.2 IC1_S1.4 R58_RB_C121.2 R60_RB_C121.2 | length 73.2
  Top Layer w0.2: v1(79.5,31.9) 81.707,31.9 82.341,32.534 IC1_S1.4@82.352,32.534
  Top Layer w0.4: v1(67.5,48.25) 67.557,48.193 67.557,47.995 67.566,47.986 67.566,39.434 v1(70.25,36.75)
  Bottom Layer w0.4: D8_S1.2@39.885,63.75 50,63.75 50.75,64.5 50.75,66.448 R60_RB_C121.2@50.802,66.5 ; R58_RB_C121.2@50.802,70.5 R60_RB_C121.2@50.802,66.5 ; v1(67.5,48.25) 64,51.75 64,59.75 57.25,66.5 R60_RB_C121.2@50.802,66.5 ; v1(70.25,36.75) 70.25,36.735 75.085,31.9 77.3,31.9 v1(79.5,31.9)
CB_14_S2: D8_S2.2 IC1_S2.4 R58_RB_C122.2 R60_RB_C122.2 | length 58
  Top Layer w0.2: v1(204.5,31.75) 204.635,31.75 204.827,31.941 205.759,31.941 IC1_S2.4@206.352,32.534
  Bottom Layer w0.4: D8_S2.2@184.115,69.25 R58_RB_C122.2@180.552,69.25 R60_RB_C122.2@180.552,65.25 180.552,61.698 191.25,51 191.25,38.986 199.586,30.65 201.385,30.65 202.985,32.25 204,32.25 v1(204.5,31.75)
CELL_REF_S1: C62_S1.2 D6_S1.2 D7_S1.1 P3.2 R48_S1.2 R57_RB_C11.1 R59_RB_C11.1 | length 205.9
  Top Layer w0.2: C62_S1.2@38,66.5 39,66.5 39.5,66 39.5,61.5 40.75,60.25 106.25,60.25 v1(110.5,56) ; R48_S1.2@101.335,46.835 v1(102.25,47.75)
  Top Layer w0.4: C62_S1.2@38,66.55 P3.2@38,70.45 ; P3.2@38,70.4 v1(38,74.75)
  Bottom Layer w0.2: v1(102.25,47.75) 102.75,47.75 110.5,55.5 v1(110.5,56)